# Altium PCB buz_PCB_5x10.PcbDoc
Units mil, origin at the board's own origin, x right, y up, seen from the top; angles counter-clockwise.
Board outline 3950 x 2000 mil, 2 copper layers (Top Layer, Bottom Layer); 17 components, 12 nets, 53 pads, 4 vias.
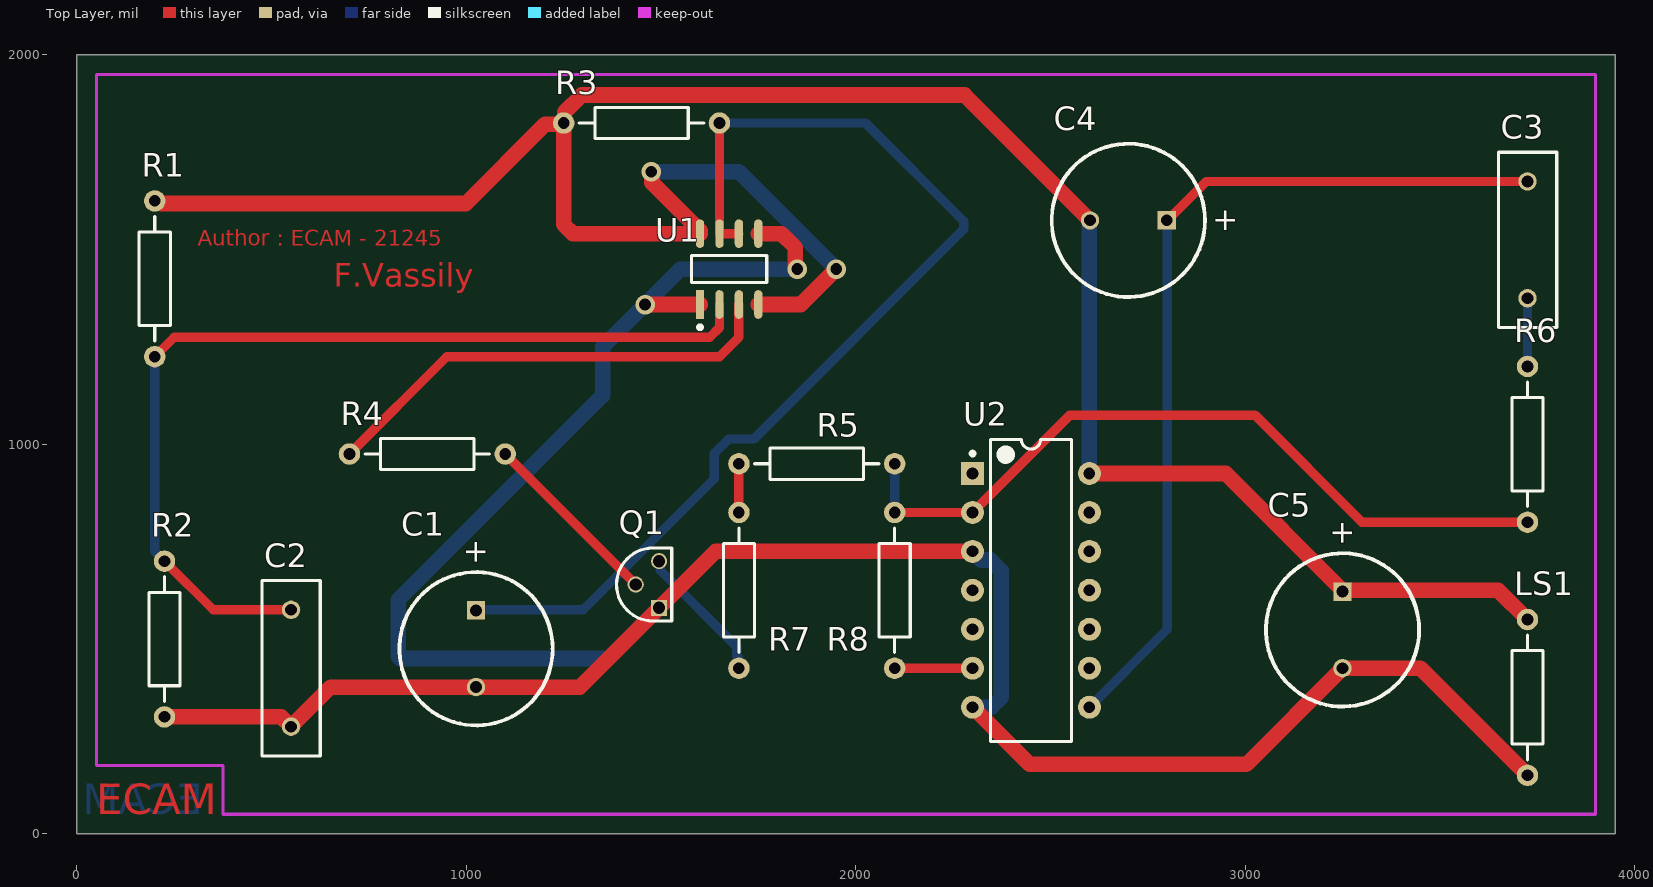
[diagram p0: Top Layer view]
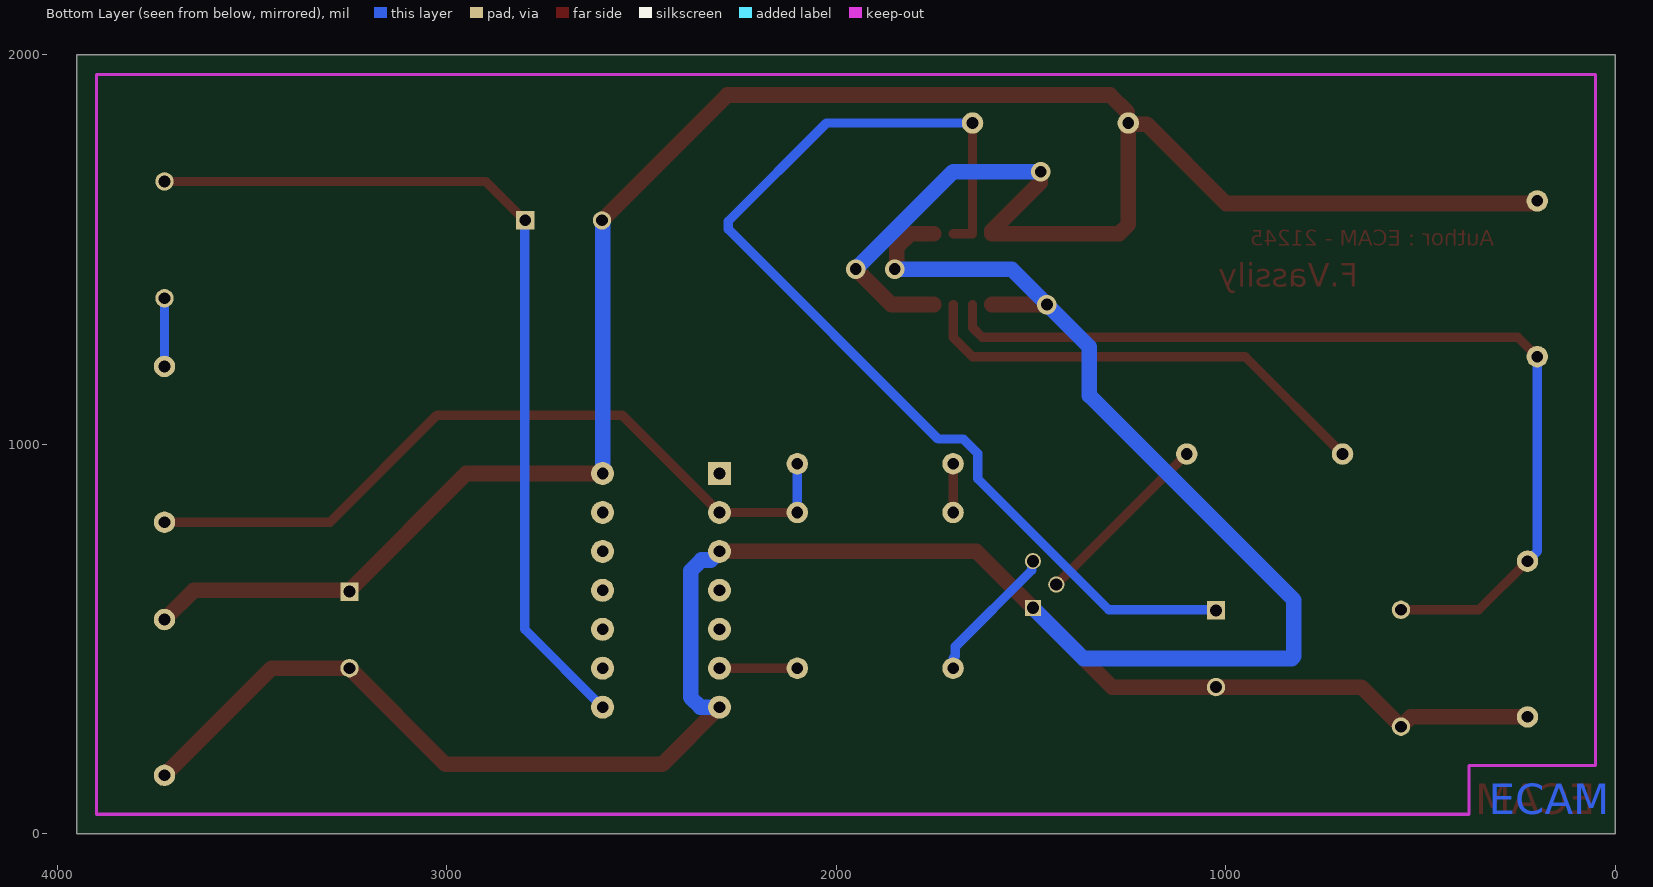
[diagram p1: Bottom Layer view, seen from below]

## Layer stack, top to bottom
Top Solder: solder mask 0.4, Solder Resist, Dk 3.5
Top Layer: signal copper 1.4
Dielectric1: core 12.6, FR-4, Dk 4.8
Bottom Layer: signal copper 1.4
Bottom Solder: solder mask 0.4, Solder Resist, Dk 3.5

## Board outline
0,0 0,2000 3950,2000 3950,0

## Design rules (kind name [scope] priority, off if disabled: settings)
Clearance "Clearance P DIP" [(IsTrack) vs (IsPad AND( HasFootprint('DIP*')))] p1: gap=5 ignorepadtopadclearanceinfootprint=FALSE
Clearance "Clearance PT" [(isTrack) vs (isPad)] p2: gap=5 ignorepadtopadclearanceinfootprint=FALSE
Clearance "Clearance TT" [(isTrack) vs (isTrack)] p3: gap=5 ignorepadtopadclearanceinfootprint=FALSE
Clearance "Clearance PP" [(IsPad) vs (IsPad)] p4: gap=5 ignorepadtopadclearanceinfootprint=FALSE
Clearance [All] p5: gap=5 ignorepadtopadclearanceinfootprint=FALSE
FabricationTestPointUsage TestPointUsage [All] p1: valid=0 allowmultiple=FALSE
FabricationTestpoint Testpoint [All] p1: side=3 testpointundercomponent=TRUE minsize=40 maxsize=100 preferedsize=60 minholesize=0 maxholesize=40 preferedholesize=32 testpointgrid=1 allowsidetop=TRUE allowsidebottom=TRUE usegrid=TRUE gridtolerance=0.01
HoleSize [All] p1: absolutevalues=TRUE maxlimit=40 minlimit=30 maxpercent=80.000 minpercent=20.000
PolygonConnect [All] p1: connectstyle=Relief reliefconductorwidth=10 reliefentries=4 polygonreliefangle="90 Angle" airgapwidth=10
RoutingCorners [All] p1: cornerstyle=45-Degree minsetback=100 maxsetback=1000
RoutingVias "ECAM Vias" [All] p1: holewidth=19.68 width=80 viastyle="Through Hole" minholewidth=17.72 minwidth=60 maxholewidth=21.65 maxwidth=120
SolderMaskExpansion [All] p1: expansion=4 istentingtop=FALSE
Width Width_GND [InNet('GND')] p1: maxlimit=1000 minlimit=40 preferedwidth=40
Width Width_VCC [InNet('VCC')] p2: maxlimit=1000 minlimit=40 preferedwidth=40
Width [All] p3: maxlimit=1000 minlimit=20 preferedwidth=24
26 further rules are at their usual default settings.

## Components (designator, comment, footprint, x,y, rotation, side; value= is the part's Value field where it differs from the comment)
C1 "1u0" RB7.6-15 1025,475 r90 top
C2 "Cap" RAD-0.3 550,425 r90 top
C3 "6n8" RAD-0.3 3725,1525 r90 top
C4 "100u" RB7.6-15 2700,1575 r0 top
C5 "100u" RB7.6-15 3250,523.43 r90 top
LS1 "8-40R" AXIAL-0.4 3725,350 r270 top
Q1 "2N3904BU" FAIR-TO-92 1480,590 r90 top
R1 "Res2" AXIAL-0.4 200,1425 r270 top
R2 "Res2" AXIAL-0.4 225,500 r90 top
R3 "Res2" AXIAL-0.4 1450,1825 r180 top
R4 "Res2" AXIAL-0.4 900,975 r180 top
R5 "Res2" AXIAL-0.4 1900,950 r180 top
R6 "Res2" AXIAL-0.4 3725,1000 r270 top
R7 "Res2" AXIAL-0.4 1700,625 r90 top
R8 "Res2" AXIAL-0.4 2100,625 r90 top
U1 "NE555DR" FP-D0008A-IPC_C 1675,1450 r90 top
U2 "LM380N" N14A 2450,625 r0 top

## Footprints (in the part's own frame and the unit in brackets; to place one, negate y for a bottom-side part, rotate by r counter-clockwise, add the part's x,y. Pads: shape width x height; smd on the part's side, far side on the other; paste and mask are expansions set on the pad)
AXIAL-0.4 [mm] "Axial Device, Thru-Hole; 2 Leads; 0.4 in Pin Spacing"
  round 1.4 hole 0.762: 1(-5.08,0) 2(5.08,0)
  silkscreen extent -4.06,-1.02 4.06,1.02
FAIR-TO-92 [mm] "TO, 3-Leads, Body Dia 4.79mm, Pitch 1.27mm"
  rect 1.05x1.05 hole 0.8 mask+0.05: 1(-0.254,-0.381)
  round 1.05 hole 0.8 mask+0.05: 2(1.27,1.143) 3(2.794,-0.381)
  silkscreen extent -1.11,-1.21 3.65,2.4
FP-D0008A-IPC_C [mil]
  rect 73.59x21.34 smd paste+0 mask+0: 1(-91.09,75)
  rrect100% 73.59x21.34 smd paste+0 mask+0: 2(-91.09,25) 3(-91.09,-25) 4(-91.09,-75) 5(91.09,-75) 6(91.09,-25) 7(91.09,25) 8(91.09,75)
  silkscreen extent -154,-97 35,97, body extent -132,-100 132,100, height 10
N14A [mm] "DIP, 14-Pin, Row Spacing 7.62 mm, Pitch 2.54 mm"
  rect 1.5x1.5 hole 0.762: 1(-3.81,7.62)
  round 1.5 hole 0.762: 2(-3.81,5.08) 3(-3.81,2.54) 4(-3.81,0) 5(-3.81,-2.54) 6(-3.81,-5.08) 7(-3.81,-7.62) 8(3.81,-7.62) 9(3.81,-5.08) 10(3.81,-2.54) 11(3.81,0) 12(3.81,2.54) 13(3.81,5.08) 14(3.81,7.62)
  silkscreen extent -3.93,-9.85 2.65,9.85, body extent -3.55,-9.85 3.55,9.85, height 5.33
RAD-0.3 [mm] "Radial Cap, Thru-Hole; 2 Leads; 0.3 in Pin Spacing"
  round 1.2 hole 0.762: 1(-3.81,0) 2(3.81,0)
  silkscreen extent -5.71,-1.91 5.71,1.91
RB7.6-15 [mm] "Polarized Capacitor (Radial); 2 Leads"
  rect 1.2x1.2 hole 0.762: 1(2.5,0)
  round 1.2 hole 0.762: 2(-2.5,0)
  silkscreen extent -5,-5 5,5

## Part data
C1 C4 C5: library part "Cap Pol1", "Polarized Capacitor (Radial)"
C2: "Capacitor"
C3: library part Cap, "Capacitor"
LS1: library part Speaker, "Loudspeaker"
Q1: "NPN General-Purpose Amplifier, 40 V VCEO, 0.2 A, -55 to 150 degC, 2-Pin TO-92, RoHS, Bulk"
R1 R2 R3 R4 R5 R6 R7 R8: "Resistor"
U1: library part 555, "IC OSC SGL TIMER 100KHZ 8-SOIC"
U2: "2.5W Audio Power Amplifier, 14-pin MDIP"

## Via types
v1: diameter 50, hole 30, Top Layer to Bottom Layer, 4 vias

## Nets (pads, with @x,y where several pads share a name; then routed paths per layer and width w, separated by ;. In a path a pad name is that pad's centre, name@x,y a point inside that pad or via, vN(x,y) a via of type N, cw(c..) or ccw(c..) an arc to the next point about the centre after c; other vN are vias at no path point)
GND: C1.2 C2.1 C5.2 LS1.2 Q1.1 R2.1 U1.1 U1.5 U2.3 U2.7 | length 7106.8
  Top Layer w40: R2.1 525,300 C2.1 651.57,376.57 C1.2 1291.57,376.57 1640,725 U2.3 ; v1(1458.91,1358.91) U1.1 ; U1.5 1808.91,1541.09 1845,1505 1845,1455 v1(1850,1450) ; U2.7 2447,178 3003,178 C5.2 3450,425 LS1.2
  Bottom Layer w40: Q1.1 1365,450 830.86,450 825,455.86 825,600 1350,1125 1350,1250 v1(1458.91,1358.91) 1550,1450 v1(1850,1450) ; U2.7 2349,325 2374,350 2374,675 2346,703 2322,703 U2.3
NetC1_1: C1.1 R3.1 U1.6 U1.7 | length 2781.6
  Top Layer w24: R3.1 U1.7 1650,1541 1700,1541 U1.6
  Bottom Layer w24: C1.1@1025,575 1300,575 1636.44,911.44 1636.44,976.33 1673.67,1013.56 1738.56,1013.56 2277.56,1552.56 2277.56,1572.44 2025,1825 R3.1
NetC2_2: C2.2 R1.2 R2.2 U1.2 | length 2452.1
  Top Layer w24: R1.2 250,1275 1625,1275 1650,1300 U1.2 ; R2.2 350,575 C2.2
  Bottom Layer w24: R1.2 200,725 R2.2
NetC3_1: C3.1 R6.1 | length 175
  Bottom Layer w24: R6.1 C3.1
NetC3_2: C3.2 C4.1 U2.8 | length 2299.3
  Top Layer w24: C4.1@2800,1575 2900,1675 C3.2
  Bottom Layer w24: U2.8 2800,525 C4.1@2800,1575
NetQ1_2: Q1.2 R4.1 | length 473.8
  Top Layer w24: R4.1 Q1.2
NetQ1_3: Q1.3 R7.1 | length 334.9
  Bottom Layer w24: Q1.3 1498.32,696.68 1498.32,676.68 1694.05,480.95 1694.05,455.95 R7.1@1700,450
NetR4_2: R4.2 U1.3 | length 1208.2
  Top Layer w24: R4.2 950,1225 1650,1225 1700,1275 U1.3
NetR5_1: R5.1 R6.2 R8.2 U2.2 | length 1967.5
  Top Layer w24: R8.2 U2.2 2550,1075 3025,1075 3300,800 R6.2
  Bottom Layer w24: R8.2 R5.1
NetR5_2: R5.2 R7.2 | length 100
  Top Layer w24: R7.2@1700,850 R5.2
NetR8_1: R8.1 U2.6 | length 200
  Top Layer w24: R8.1 U2.6
VCC: C4.2 C5.1 LS1.1 R1.1 R3.2 U1.4 U1.8 U2.14 | length 6218
  Top Layer w40: R1.1 202.89,1622.11 213.58,1622.11 217.26,1618.43 999.13,1618.43 1202.81,1822.11 1247.11,1822.11 R3.2 1250,1564.52 1273.43,1541.09 U1.8 1600,1548.55 1476.91,1671.64 1476.91,1698.09 v1(1475,1700) ; 1252.89,1852.89 1297,1897 2279.57,1897 C4.2 ; U1.4 1858.91,1358.91 v1(1950,1450) ; U2.14 2950,925 3246.38,628.62 3246.38,625.47 3246.85,625 3650,625 LS1.1
  Bottom Layer w40: v1(1475,1700) 1700,1700 v1(1950,1450) ; U2.14 C4.2@2600,1575
pads on no net: U2.1 U2.4 U2.5 U2.9 U2.10 U2.11 U2.12 U2.13

## Keep-outs
Keep-Out Layer:
  lines w8: 50,175 375,175 375,50 3900,50 3900,1950 50,1950 50,175

## Other copper
Top Layer:
  text "Author : ECAM - 21245" at 310,1510 h40
  text "F.Vassily" at 660,1404.99 h60
  text "ECAM" at 50,50 h78.74
  text ".GTL" at 6764,-2628 h90
Bottom Layer:
  text "ECAM" at 325,50 h78.74
  text ".GBL" at 6764,-2628 h90
Multi-Layer:

## Silkscreen, mask and mechanical layers (free items; w line width, h text height)
Top Overlay:
  text ".GTO" at 6764,-2628 h90
Top Paste:
  text ".GTP" at 6764,-2628 h90
Bottom Paste:
  text ".GBP" at 6764,-2628 h90
Top Solder:
  text ".GTS" at 6764,-2628 h90
Bottom Solder:
  text ".GBS" at 6764,-2628 h90
Mechanical 1:
  the board outline again, w7.87
Mechanical 16:
  circle w3.94: c5670,-2615 r55.12
  lines w5: -3175,-1325 -2975,-1325 ; -3175,575 -2975,575 ; -3175,2475 -2975,2475 ; -695,-3225 -695,-3025 ; -695,4175 -695,4375 ; 2180,-3225 2180,-3025 ; 2180,4175 2180,4375 ; 2735,1335 2935,1335 ; 2815,-2725 7315,-2725 ; 2815,-2425 7315,-2425 ; 2815,-2125 4315,-2125 ; 4315,-3025 4315,-2425 4315,-1825 ; 5055,-3225 5055,-3025 ; 5055,4175 5055,4375 ; 6415,-3025 6415,-2425 ; 7315,-1335 7515,-1335 ; 7315,2465 7515,2465 ; 2815,-3025 1415,-3025 1415,-1825 2815,-1825 ; 2815,-3025 7315,-3025 ; 2815,-3025 2815,-1825 ; 2815,-1825 4315,-1825 ; 4315,-1825 7315,-1825 7315,-3025 ; 7315,-3025 7315,4175 -2975,4175 -2975,-3025 7315,-3025 ; -3175,-3225 -3175,4375 7515,4375 7515,-3225 -3175,-3225
  text "1" at -2143,4240 h70
  text "2" at 717,4240 h70
  text "3" at 3597,4240 h70
  text "4" at 6467,4240 h70
  text "A" at -3100,3334 h70
  text "A" at 7390,3324 h70
  text "B" at -3100,1442 h70
  text "B" at 7390,1432 h70
  text "C" at -3100,-468 h70
  text "C" at 7390,-478 h70
  text "Concepteur du circuit :" at 2865,-1925 h45
  text "TITRE :" at 4365,-1925 h45
  text "Flioris Vassily" at 3240,-2075 h80
  text "Doorbuzzer" at 4625,-2195 h100
  text "Concepteur du PCB :" at 2865,-2220 h45
  text "ECAM" at 1650,-2235 h240
  text "D" at -3100,-2358 h70
  text "D" at 7390,-2368 h70
  text "Flioris Vassily" at 3235,-2380 h80
  text "Prom. de l'Alma, 50" at 1575,-2475 h60
  text "Date :" at 2865,-2525 h45
  text "PART NO.:" at 4365,-2525 h45
  text "Layer :" at 6465,-2525 h45
  text ".Print_Date" at 3255,-2560 h70
  text "1" at 4370,-2645 h60
  text "C" at 5645,-2645 h60
  text "ECAM" at 5751,-2660 h100
  text ".Print_Time" at 3260,-2690 h70
  text "1200 Bruxelles" at 1720,-2725 h60
  text "Nom du fichier :" at 2865,-2825 h45
  text "DWG NO:" at 4365,-2825 h45
  text ".Print_Scale" at 6625,-2905 h40
  text ".Printout_Name" at 4515,-2940 h60
  text ".Pcb_File_Name_No_Path" at 2915,-2945 h70
  text "1" at -2143,-3160 h70
  text "2" at 717,-3160 h70
  text "3" at 3597,-3160 h70
  text "4" at 6467,-3160 h70

## Text inside footprints (layer, text, board x,y; h text height)
C1: Top Overlay "+" at 1050,690 h59.06 r90
C4: Top Overlay "+" at 2915,1550 h59.06
C5: Top Overlay "+" at 3275,738.43 h59.06 r90